# Altium PCB discovery_shield.PcbDoc (part 2 of 2)
Units mm, origin at the board's own origin, x right, y up, seen from the top; angles counter-clockwise.
Board outline 147.5 x 100.12 mm, 2 copper layers (Top Ground, Bottom Ground); 77 components, 41 nets, 312 pads, 78 vias.
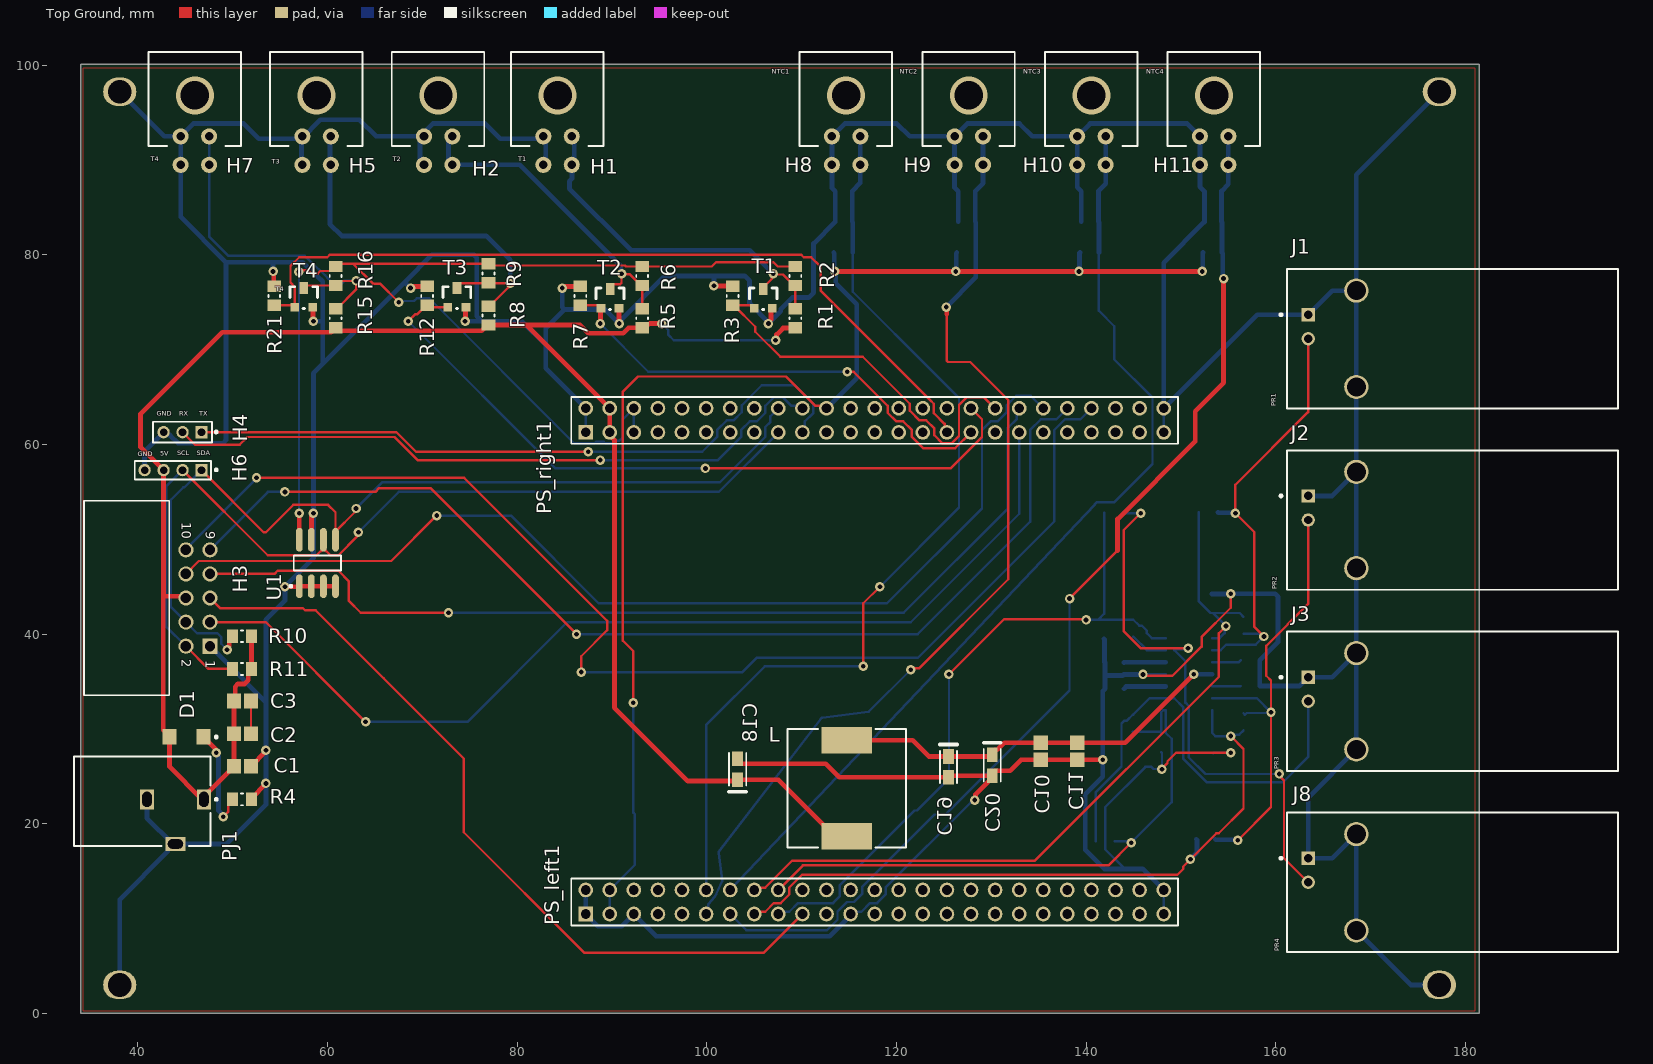
[diagram p0: Top Ground view]

## Via types
v1: diameter 1, hole 0.5, Top Ground to Bottom Ground, 70 vias
v2: diameter 4, hole 3, Top Ground to Bottom Ground, 8 vias

## Nets (pads, with @x,y where several pads share a name; then routed paths per layer and width w, separated by ;. In a path a pad name is that pad's centre, name@x,y a point inside that pad or via, vN(x,y) a via of type N, cw(c..) or ccw(c..) an arc to the next point about the centre after c; other vN are vias at no path point) (continued)
I2C_SDA: (continued)
  Top Ground w0.254: H6.1 53.27,50.73 53.48,50.73 56.381,53.631 60.05,53.631 60.83,52.851 U1.5@60.83,50.83 ; U1.5 60.83,50.169 U1.5@60.83,50.83 ; v1(63,53.25) 62.857,53.107 62.857,52.857 U1.5@60.83,50.83
  Top Ground w0.5: v1(49.396,38.353) 49.396,38.488 49.625,38.717 49.625,39.425 R10.2
  Bottom Ground w0.254: H6.1 44.875,55.475 44.775,55.475 43.475,54.175 43.475,42.853 H3.4 46.239,40.089 48.378,40.089 48.779,39.688 48.779,38.988 49.396,38.371 v1(49.396,38.353) ; v1(63,53.25) 65.75,56 101.355,56 106.156,60.801 106.156,61.831 106.7,62.375 106.7,62.98 PS_right1.18
NetC2_2: C2.2 C3.2 | length 3.4
  Top Ground w0.254: C2.2 C3.2
NetC4_1: C4.1 J1.2 R13.1 U2.2 | length 46
  Top Ground w0.254: v1(158.75,39.75) 157.75,40.75 157.75,50.75 v1(155.75,52.75) 155.75,55.75 163.42,63.42 J1.2
  Bottom Ground w0.254: U2.2 154.2,38.315 154.779,38.894 157.894,38.894 v1(158.75,39.75) 158.548,39.75 158.273,40.025 C4.1
  Bottom Ground w0.5: R13.1 153.95,52.8 155.7,52.8 v1(155.75,52.75)
NetC5_1: C5.1 J2.2 R20.1 U2.6 | length 49.6
  Top Ground w0.254: v1(156,18.25) 159.5,21.75 159.5,35.103 159,35.603 159,38.754 163.42,43.174 J2.2
  Bottom Ground w0.254: U2.6 158.015,33.235 v1(159.5,31.75) 159.435,31.685 156.935,31.685 156.75,31.5 C5.1@156.6,31.65
  Bottom Ground w0.5: R20.1 153.688,18.313 155.937,18.313 v1(156,18.25)
NetC6_1: C6.1 J3.2 R24.1 U2.9 | length 48.2
  Bottom Ground w0.254: R24.1 141,23.306 143.733,26.039 143.733,30.572 144.038,30.877 144.302,30.877 C6.1 144.95,31.5 146.685,33.235 U2.9 149.3,33.235 150.225,32.31 150.225,26.882 152.738,24.369 160.746,24.369 163.42,27.043 J3.2
NetC12_1: C12.1 J8.2 R31.1 U2.13 | length 63.1
  Top Ground w0.254: v1(145.75,52.75) 143.95,50.95 143.95,40.327 145.777,38.5 v1(150.75,38.5) ; v1(160.381,25.25) 160.381,25.048 160.875,24.554 160.875,16.37 J8.2
  Bottom Ground w0.254: R31.1 143.975,52.75 v1(145.75,52.75) ; C12.1 145,39.725 146.41,38.315 U2.13 ; v1(150.75,38.5) 150.65,38.4 149.385,38.4 149.3,38.315 150.469,37.146 150.469,32.784 150.83,32.423 150.83,26.995 152.575,25.25 v1(160.381,25.25)
NetD1_1: D1.1 R4.1 | length 11.5
  Top Ground w0.254: v1(49,20.75) 49.502,21.252 49.502,22.102 R4.1
  Top Ground w0.5: D1.1 46.925,29.125 48.231,27.819 48.231,27.519 v1(48.25,27.5)
  Bottom Ground w0.5: v1(48.25,27.5) 48.25,27.365 48.5,27.115 48.5,21.385 49,20.885 v1(49,20.75)
NetH1_1: H1.1 H1.2 R1.1 R2.1 T1.3 | length 37.9
  Top Ground w0.254: T1.3 105.95,76.57 106.857,77.477 106.857,77.857 v1(107,78) 107.066,77.934 108.041,77.934 109.2,76.775 R2.1 R1.1
  Bottom Ground w0.5: H1.1@85.77,89.27 85.77,88.02 85.5,87.75 85.5,87 92,80.5 104.5,80.5 v1(107,78) ; H1.1@86,89.25 86,89.5 H1.2@86,92.25
NetH2_1: H2.1 H2.2 R5.1 R6.1 T2.3 | length 33.7
  Top Ground w0.254: T2.3 89.8,76.57 90.13,76.9 90.851,76.9 91,77.049 v1(91,78) 91.056,77.944 91.881,77.944 93.05,76.775 R6.1 R5.1
  Bottom Ground w0.5: H2.1@72.75,89.5 H2.2@72.75,92.5 ; H2.1 80.25,89.5 90.904,78.846 90.904,78.096 v1(91,78)
NetH3_3: H3.3 PS_right1.37 | length 107.4
  Top Ground w0.254: H3.3 53.48,41.27 v1(64,30.75)
  Bottom Ground w0.254: v1(64,30.75) 74.75,30.75 85.25,41.25 121.5,41.25 132.94,52.69 PS_right1.37
NetH3_5: H3.5 PS_left1.19 | length 84.2
  Top Ground w0.254: H3.5 48.658,42.75 57.386,42.75 57.636,42.5 58.75,42.5 65.901,35.349 74.363,26.888 74.363,19.112 87.1,6.375 105.975,6.375 PS_left1.19
NetH3_7: H3.7 PS_right1.38 | length 103
  Top Ground w0.254: H3.7 54.382,46.35 54.713,46.681 61.133,46.681 62.245,45.569 62.245,43.505 63.5,42.25 v1(72.75,42.25)
  Bottom Ground w0.254: v1(72.75,42.25) 120.75,42.25 131.75,53.25 131.75,61.765 132.692,62.707 132.692,63.572 PS_right1.38
NetH3_8: H3.8 PS_right1.40 | length 111.7
  Top Ground w0.254: H3.8 46.417,47.709 66.709,47.709 v1(71.5,52.5)
  Bottom Ground w0.254: v1(71.5,52.5) 79.333,52.5 88.583,43.25 119,43.25 129.016,53.266 129.016,61.531 129.921,62.436 130.651,62.436 131.638,63.423 131.638,64.163 132.625,65.15 134.15,65.15 PS_right1.40
NetH3_9: H3.9 PS_right1.42 | length 115
  Top Ground w0.254: v1(55.5,55) 65.037,55 65.438,55.401 70.849,55.401 v1(86.25,40)
  Bottom Ground w0.254: H3.9 53.708,55 v1(55.5,55) ; v1(86.25,40) 122.25,40 134.096,51.846 134.096,61.531 135.229,62.664 136.864,62.664 PS_right1.42
NetH3_10: H3.10 PS_right1.44 | length 131.5
  Top Ground w0.254: v1(52.5,56.5) 74.393,56.5 89.5,41.393 89.5,40.423 86.75,37.673 v1(86.75,36)
  Bottom Ground w0.254: H3.10 45.058,48.974 52.5,56.416 v1(52.5,56.5) ; v1(86.75,36) 103.75,36 105.25,37.5 122.25,37.5 136.636,51.886 136.636,61.531 137.769,62.664 139.404,62.664 PS_right1.44
NetH5_1: H5.1 H5.2 R8.1 R9.1 T3.3 | length 41.4
  Top Ground w0.254: T3.3 73.65,76.691 73.98,77.022 76.947,77.022 R9.1 77.025,77 v1(79.25,77) 79.107,76.857 79.107,76.607 77.1,74.6 R8.1
  Bottom Ground w0.5: H5.1@60.25,89.5 H5.2@60.25,92.25 ; H5.1 60.25,89.417 60.25,83.25 61.5,82 76.725,82 79.25,79.475 v1(79.25,77)
NetH7_1: H7.1 H7.2 R15.1 R16.1 T4.3 | length 37.9
  Top Ground w0.254: T4.3 57.762,76.775 R16.1 61.323,77.248 62.998,77.248 v1(63,77.25) 63,76.35 60.975,74.325 R15.1
  Bottom Ground w0.254: H7.2 H7.1 47.5,81.943 49.554,79.889 57.575,79.889 57.649,79.819 58.249,79.251 59.732,77.849 60.109,77.472 60.351,77.149 60.5,77 60.605,77 61.524,77 61.774,77.25 v1(63,77.25)
NetR17_2: R17.2 U2.3 | length 3.1
  Bottom Ground w0.254: U2.3 156.12,37.045 R17.2
NetR23_2: R23.2 U2.5 | length 3
  Bottom Ground w0.254: U2.5 156.28,34.505 R23.2
NetR30_2: R30.2 U2.10 | length 4.5
  Bottom Ground w0.5: R30.2 144.217,34.467 148.362,34.467 U2.10
NetR33_2: R33.2 U2.12 | length 4.4
  Bottom Ground w0.5: R33.2 144.023,37.023 148.378,37.023 U2.12
PA0/ADC1_IN0: C13.2 C14.2 H8.1 H8.2 PS_left1.12 R25.1 | length 101.6
  Top Ground w0.254: v1(116.5,36.619) 116.5,43.25 v1(118.25,45)
  Bottom Ground w0.254: PS_left1.12 99.92,30.42 106.119,36.619 v1(116.5,36.619) ; R25.1 115.383,76.117 124.167,67.333 126.598,64.902 126.598,53.348 v1(118.25,45)
  Bottom Ground w0.5: R25.1 115.383,83.45 C14.2 C13.2 115.333,86.736 116.187,87.59 H8.1 H8.2
PA1/ADC1_IN1: C7.2 C8.2 H9.1 H9.2 PS_left1.11 R26.1 | length 102.9
  Top Ground w0.254: v1(121.5,36.25) 121.631,36.381 122.381,36.381 131.784,45.784 131.784,61.456 131.8,61.472 131.8,63.628 cw(c132.94,63.82) 131.8,64.012 131.8,64.675 127.775,68.7 125.449,68.7 125.3,68.849 125.3,73.75
  Top Ground w0.5: v1(125.25,74.5) 125.3,74.45 125.3,73.75
  Bottom Ground w0.254: PS_left1.11 100.168,10.728 100.168,11.528 100.8,12.27 ccw(c99.92,13.02) 100.973,12.543 101.603,13.929 101.626,13.979 101.626,14.05 101.248,16.899 101.246,16.916 101.246,17.019 112.015,31.088 112.088,31.16 112.173,31.172 117.072,31.822 v1(121.5,36.25)
  Bottom Ground w0.5: v1(125.25,74.5) 128.367,77.617 R26.1 128.367,83.45 C8.2 C7.2 128.317,86.736 129.125,87.545 H9.1 H9.2
PA2/ADC1_IN2: C9.2 C15.2 H10.1 H10.2 PS_left1.14 R27.1 | length 101.1
  Bottom Ground w0.254: PS_left1.14 140.919,53.669 140.919,53.708 141.142,53.931 142.981,53.931 147,57.95 147,64.951 142.975,68.976 142.975,72.475 141.35,74.1 R27.1
  Bottom Ground w0.5: R27.1 141.35,83.45 C15.2 C9.2 141.3,86.736 142.062,87.499 H10.1 H10.2
PA3/ADC1_IN3: C16.2 C17.2 H11.1 H11.2 PS_left1.13 R28.1 | length 113.5
  Top Ground w0.254: v1(138.25,43.75) 143.319,48.819
  Top Ground w0.5: 143.319,48.819 143.319,52.137 151.5,60.318 151.5,63.5 154.5,66.5 v1(154.5,77.5)
  Bottom Ground w0.254: PS_left1.13 104.165,8.775 112.675,8.775 113.776,9.876 113.776,10.731 114.795,11.75 115.525,11.75 116.373,12.598 116.373,13.328 124.02,20.975 125.175,20.975 138.25,34.05 v1(138.25,43.75)
  Bottom Ground w0.5: v1(154.5,77.5) 154.417,77.583 154.417,80.155 R28.1 154.333,83.45 C17.2 C16.2 154.283,86.736 155,87.453 H11.1 H11.2
PA4/ADC2_IN4: C4.2 PS_left1.16 R13.2 R14.2 U2.1 | length 83
  Top Ground w0.254: PS_left1.16 105.248,13.268 106.153,13.268 109.004,16.119 134.607,16.119 153.981,35.493 153.981,40.081 v1(154.75,40.85)
  Bottom Ground w0.254: R13.2 151.9,43.45 153.125,42.225 R14.2 156.2,42.225 C4.2 ; U2.1 154.079,39.585 154.607,40.113 154.607,40.707 v1(154.75,40.85) R14.2@153.375,42.225
PA5/ADC2_IN5: C5.2 PS_left1.15 R20.2 R22.2 U2.7 | length 73.5
  Top Ground w0.254: PS_left1.15 105.248,10.728 106.153,10.728 107.061,11.636 107.791,11.636 108.696,12.541 108.696,13.271 110.05,14.625 149.625,14.625 150.241,15.241 150.241,15.491 153.746,18.996 153.996,18.996 156.6,21.6 156.6,27.9 v1(155.25,29.25)
  Bottom Ground w0.254: U2.7 153.3,29.575 153.625,29.25 v1(155.25,29.25) 155.381,29.381 156.131,29.381 C5.2@156.6,29.85
  Bottom Ground w0.5: v1(151,16.25) 151.687,16.937 151.687,18.313 R20.2
PA6/ADC2_IN6: C6.2 PS_left1.18 R24.2 R29.2 U2.8 | length 62.9
  Top Ground w0.254: PS_left1.18 110.131,15.611 142.361,15.611 v1(144.75,18)
  Bottom Ground w0.254: R24.2 144.481,18.175 144.656,18 v1(144.75,18) 149.031,22.281 149.031,28.96 148.4,29.591 U2.8 148.131,31.965 147.925,31.759 R29.2 147.775,29.7 C6.2
PA7/ADC2_IN7: C12.2 PS_left1.17 R31.2 R32.2 U2.14 | length 73.5
  Top Ground w0.254: v1(125.534,35.766) 131.343,41.575 139.925,41.575 v1(140,41.5)
  Bottom Ground w0.254: PS_left1.17 107.788,10.728 108.693,10.728 109.601,11.636 113.311,11.636 114.004,12.329 114.004,13.499 121.905,21.4 122.178,21.4 125.534,24.757 v1(125.534,35.766) ; v1(140,41.5) R32.2@141.25,41.5 ; R31.2 141.9,42.15 R32.2@141.25,41.5 ; U2.14 146.915,39.585 146.388,40.112 146.388,40.375 145.862,40.902 145.598,40.902 C12.2 R32.2 141.85,41.5 R32.2@141.25,41.5
PD0/GPIO: PS_right1.36 R3.2 T1.1 | length 41.5
  Top Ground w0.254: R3.2 R3.2@102.85,74.675 ; T1.1 104.67,74.675 R3.2@102.85,74.675 ; PS_right1.36 129.244,64.976 127.381,64.976 126.59,64.185 126.59,60.915 125.799,60.124 124.841,60.124 123.993,60.972 123.993,61.702 123.145,62.55 122.415,62.55 121.396,63.569 121.396,64.299 116.444,69.25 107.754,69.25 105.104,71.9 105.104,72.421 R3.2@102.85,74.675
PD1/GPIO: PS_right1.33 R7.2 T2.1 | length 49.6
  Top Ground w0.254: R7.2 T2.1@88.52,74.675 ; v1(114.8,67.675) 114.801,67.674 115.481,67.674 119.084,64.071 119.084,63.341 119.989,62.436 120.719,62.436 121.624,61.531 121.624,60.801 122.809,59.616 126.196,59.616 PS_right1.33
  Top Ground w0.5: v1(88.75,72.75) 88.792,72.792 88.792,74.317 T2.1
  Bottom Ground w0.254: v1(88.75,72.75) 93.825,67.675 v1(114.8,67.675)
PD2/GPIO: PS_right1.34 R12.2 T3.1 | length 76.8
  Top Ground w0.254: v1(68.5,73) 69.223,73.723 69.423,73.723 70.375,74.675 R12.2 70.693,74.482 T3.1 ; v1(99.85,57.475) 125.69,57.475 129.016,60.801 129.016,62.664 PS_right1.34
  Bottom Ground w0.254: v1(68.5,73) 84.025,57.475 v1(99.85,57.475)
PD3/GPIO: PS_right1.31 R21.2 T4.1 | length 86.7
  Top Ground w0.254: R21.2 56.342,74.675 T4.1 56.535,76.63 56.083,77.082 56.083,78.829 57.004,79.75 59.961,79.75 60.242,80.031 109.933,80.031 110.214,79.75 111,79.75 111.926,78.824 112,78.75 112,76.235 123.597,64.637 123.936,64.299 123.936,63.82 123.936,63.314 125.082,62.168 125.082,61.518 PS_right1.31
USART_RX: H4.2 PS_right1.20 | length 71.4
  Top Ground w0.254: H4.2 46.025,59.975 50.719,59.975 51.536,60.792 67.057,60.792 69.493,58.356 v1(88.75,58.356)
  Bottom Ground w0.254: v1(88.75,58.356) 101.171,58.356 103.616,60.801 103.616,61.531 104.545,62.459 105.274,62.459 106.168,63.353 106.168,64.083 107.061,64.976 108.019,64.976 108.927,64.068 109.832,64.068 PS_right1.20
USART_TX: H4.1 PS_right1.19 | length 73.5
  Top Ground w0.254: H4.1 67.268,61.3 69.325,59.243 v1(87.5,59.243)
  Bottom Ground w0.254: v1(87.5,59.243) 99.518,59.243 101.076,60.801 101.076,61.531 102.095,62.55 102.825,62.55 103.673,63.398 103.673,64.128 105.795,66.25 109.285,66.25 111.236,64.299 111.236,63.341 110.328,62.433 110.328,61.528 PS_right1.19
VDD: PS_left1.3 PS_left1.4 PS_right1.22 R25.2 R26.2 R27.2 R28.2 | length 143.8
  Top Ground w0.254: v1(92.25,32.75) 92.25,38.2 91.144,39.306 91.144,65.594 92.725,67.175 108.36,67.175 111.467,64.068 112.372,64.068 PS_right1.22
  Top Ground w0.5: v1(113.5,78.25) v1(126.25,78.25) v1(139.25,78.25) v1(152.25,78.25)
  Bottom Ground w0.254: PS_left1.3 PS_left1.4 92.4,15.66 92.4,21.029 92.25,21.179 v1(92.25,32.75)
  Bottom Ground w0.5: PS_right1.22 115.804,67.004 115.804,74.804 113.596,77.012 113.596,78.154 113.442,78.308 113.442,80.18 R25.2 ; v1(126.25,78.25) 126.308,78.308 126.308,80.18 R26.2 ; v1(139.25,78.25) 139.3,78.3 139.3,80.189 R27.2 ; v1(152.25,78.25) 152.292,78.292 152.292,80.197 R28.2
pads on no net: PS_left1.6 PS_left1.7 PS_left1.8 PS_left1.9 PS_left1.10 PS_left1.20 PS_left1.21 PS_left1.22 PS_left1.24 PS_left1.25 PS_left1.26 PS_left1.27 PS_left1.28 PS_left1.29 PS_left1.30 PS_left1.31 PS_left1.32 PS_left1.33 PS_left1.34 PS_left1.35 PS_left1.36 PS_left1.37 PS_left1.38 PS_left1.39 PS_left1.40 PS_left1.41 PS_left1.42 PS_left1.43 PS_left1.44 PS_left1.45 PS_left1.46 PS_left1.47 PS_left1.48 PS_right1.7 PS_right1.8 PS_right1.9 PS_right1.10 PS_right1.11 PS_right1.12 PS_right1.13 PS_right1.14 PS_right1.15 PS_right1.16 PS_right1.21 PS_right1.23 PS_right1.24 PS_right1.25 PS_right1.26 PS_right1.27 PS_right1.28 PS_right1.29 PS_right1.30 PS_right1.32 PS_right1.35 PS_right1.39 PS_right1.41 PS_right1.43 PS_right1.45 PS_right1.46 PS_right1.47 PS_right1.48
copper on no net:
  other v2: 46,96.82 58.833,96.82 71.667,96.82 84.25,96.82 114.687,96.82 127.625,96.82 140.563,96.82 153.5,96.82

## Polygon pours and split planes (outlines as drawn)
GND on Bottom Ground "NONET_L02_P000" (solid, remove dead copper, shelved, pour order 0): 34.25,99.75 181,99.75 181,0.25 34.25,0.25
GND on Top Ground "NONET_L01_P001" (solid, remove dead copper, shelved, pour order 1): 34.25,99.75 181,99.75 181,0.25 34.25,0.25

## Silkscreen, mask and mechanical layers (free items; w line width, h text height)
Top Overlay:
  text "NTC1" at 106.85,99.1 h0.5
  text "NTC2" at 120.35,99.1 h0.5
  text "NTC3" at 133.35,99.1 h0.5
  text "NTC4" at 146.35,99.1 h0.5
  text "T4" at 41.35,89.85 h0.5
  text "T2" at 66.85,89.85 h0.5
  text "T1" at 80.1,89.85 h0.5
  text "T3" at 54.1,89.6 h0.5
  text "T4" at 54.525,76.173 h0.5
  text "PR1" at 160,64.025 h0.5 r90
  text "RX" at 44.375,63.05 h0.5
  text "TX" at 46.45,63.05 h0.5
  text "GND" at 42,63.025 h0.5
  text "SCL" at 44.125,58.85 h0.5
  text "SDA" at 46.225,58.85 h0.5
  text "5V" at 42.325,58.825 h0.5
  text "GND" at 40,58.775 h0.5
  text "PR2" at 160.125,44.725 h0.5 r90
  text "PR3" at 160.325,25.775 h0.5 r90
  text "PR4" at 160.375,6.575 h0.5 r90
Bottom Overlay:
  lines w0.2: 134.175,16 134.175,20.575 155.3,20.575 155.3,16 134.175,16 ; 135.513,50.55 156.637,50.55 156.637,55.125 135.513,55.125 135.513,50.55
  text "Variable resistors" at 151.2,54.35 h0.5
  text "AMP4" at 143.8,50.85 h0.5
  text "AMP1" at 153.7,50.825 h0.5
  text "Variable resistors" at 149.475,19.85 h0.5
  text "AMP2" at 153.775,16.175 h0.5
  text "AMP3" at 142.825,16.05 h0.5

## Dimensions
181.45,100.125 to 181.45,0 on Top Overlay
33.95,0 to 181.45,0 on Top Overlay

## Text inside footprints (layer, text, board x,y; h text height)
H3: Top Overlay "9" at 47.133,50.85 h1.02 r270; Top Overlay "10" at 44.593,51.81 h1.02 r270; Top Overlay "2" at 44.593,37.37 h1.02 r270; Top Overlay "1" at 47.133,37.27 h1.02 r270